# EAGLE board PCB_v106 (EAGLE 9.7.0)
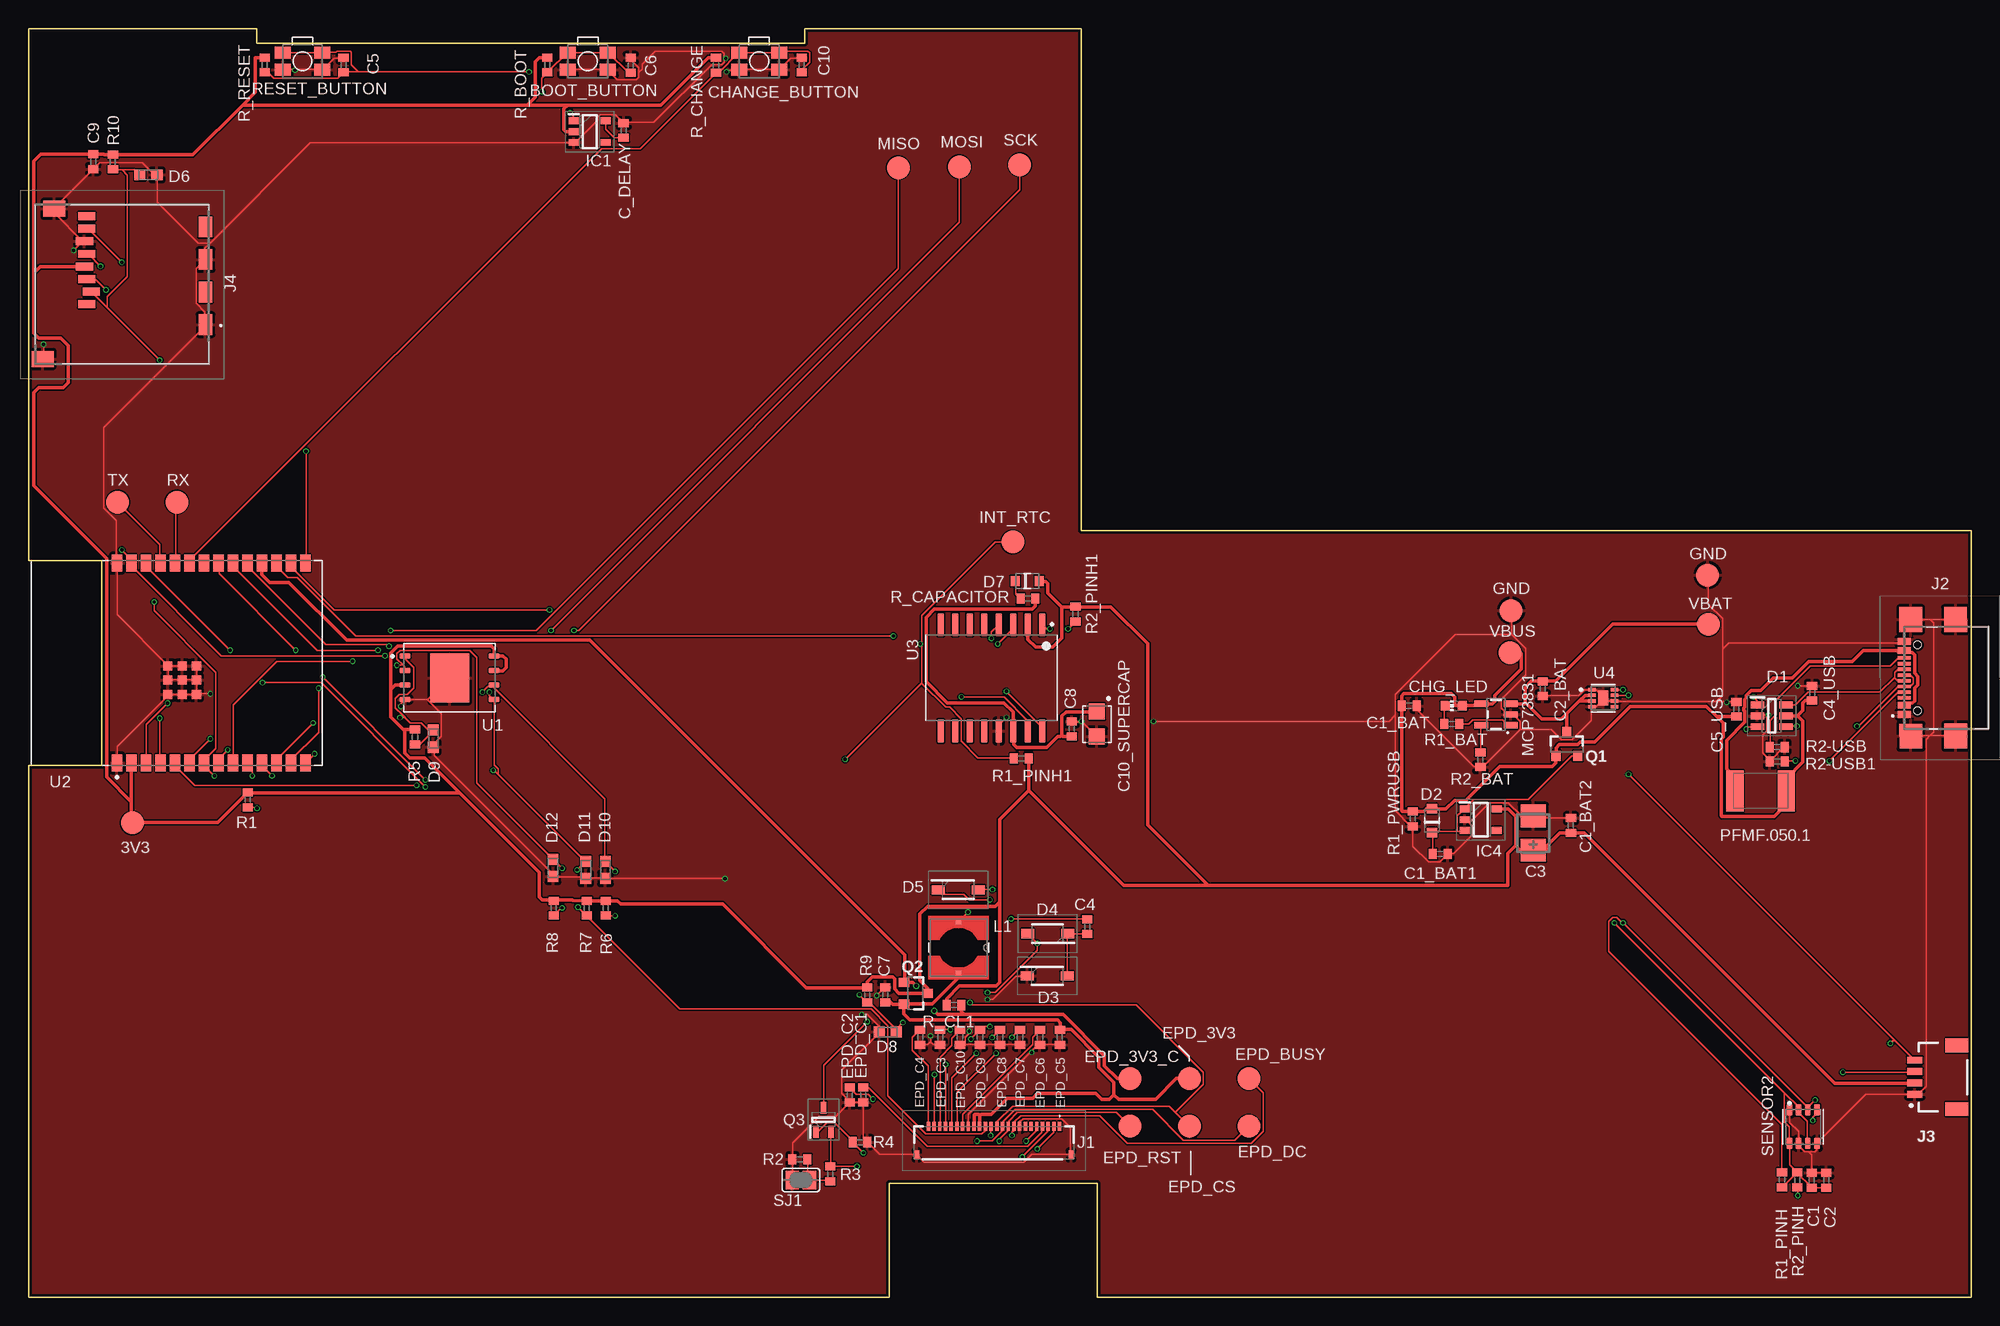
[diagram p0: board, top side]
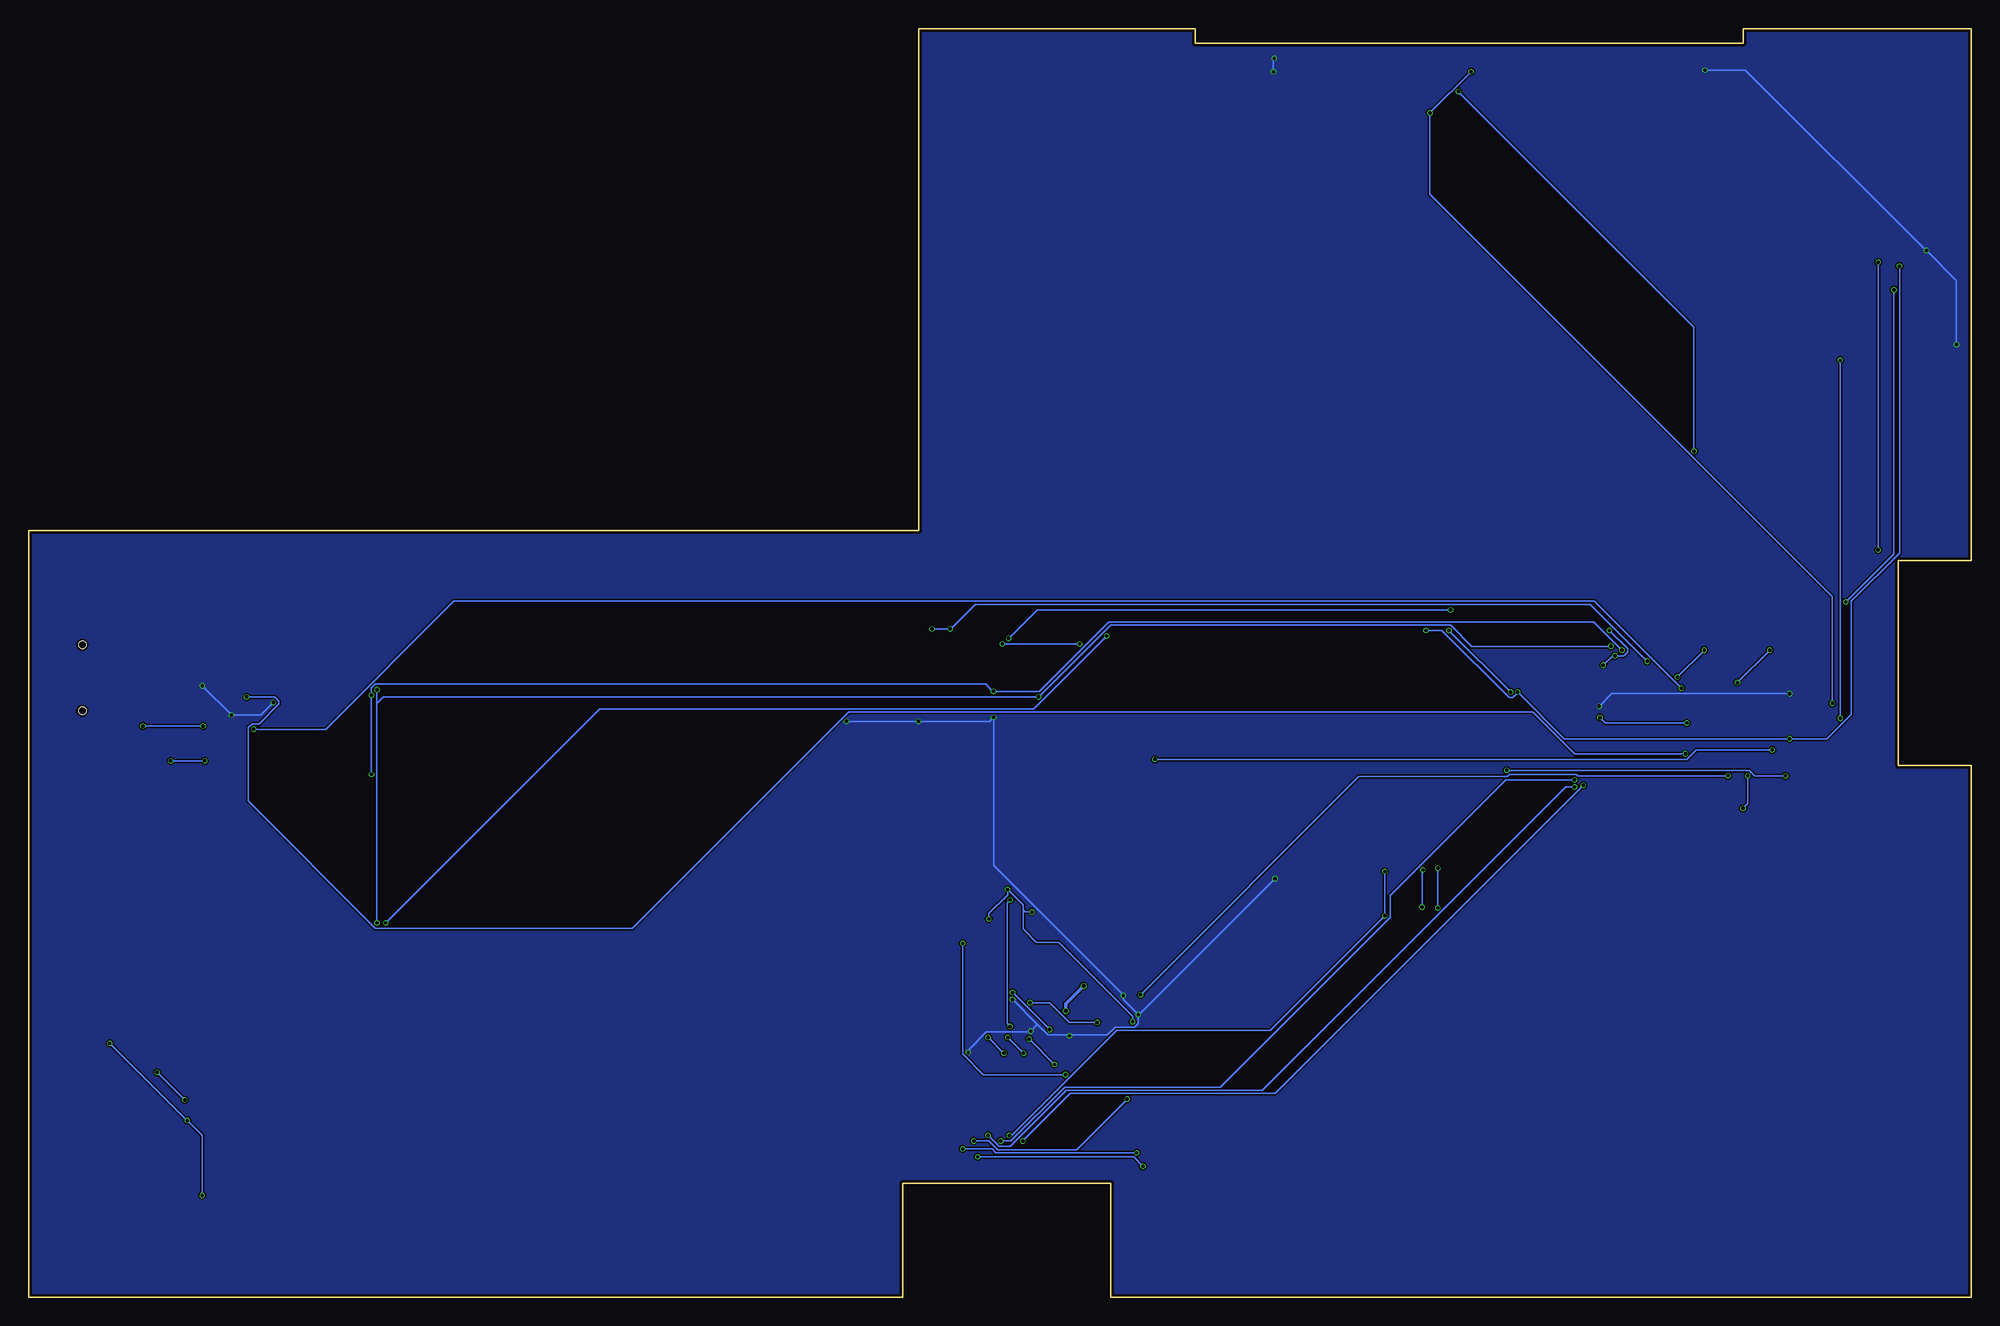
[diagram p1: board, bottom side, seen from below]

Size 170.2 x 111.2 mm. Coordinates in mm from the lower left corner, seen from the top.
Outline: 0,0 75.4,0 75.4,10 93.6,10 93.6,0 170.2,0 170.2,67.2 92.2,67.2 92.2,111.2 68,111.2 68,109.9 20,109.9 20,111.2 0,111.2 0,64.6 6.4,64.6 6.4,46.6 0,46.6 0,0
Copper layers (1*16): Top 0.035mm / dielectric 1.6mm / Bottom 0.035mm
Design rules "jlcpcb-2layers.dru *": minimum track width 5mil, minimum drill 0.3mm, track to track 5mil, track to pad 5mil, pad to pad 5mil, via to via 5mil, smd to smd 5mil, copper to edge 0.2mm, drill to drill 6mil, minimum pad ring 10mil, minimum via ring 3mil, stop-mask expansion 4mil, vias tented up to drill 0mil, thermal gap 10mil
Net classes: 0 default: width 0.15 mm; 1 SupplyLines: width 0.3 mm

## Footprints (pad centres in the part's own frame; a part is rotated, then mirrored left to right if it is on the bottom)
MYBUTTON = smd 1.4 x 1.05: 1 1.75,0.75; 2 -1.75,0.75; 3 -1.75,-0.75; 4 1.75,-0.75
EAGLE-LTSPICE_C0402 = smd 0.7 x 0.9: 1 -0.65,0; 2 0.65,0
RCL_CT3528 = smd 2 x 2.2: + -1.5,0; - 1.5,0
CAPCP3225X100N = smd 1.4 x 1.4: 1 -1.1,0; 2 1.1,0
ADAFRUIT_CHIP-LED0603 = smd 0.8 x 0.8: A 0,-0.75; C 0,0.75
SOT95P280X145-6N = smd 1.2 x 0.6: 1 -1.25,0.95; 2 -1.25,0; 3 -1.25,-0.95; 4 1.25,-0.95; 5 1.25,0; 6 1.25,0.95
ESP32_WROVER_AVX---SD0805S020S1R0_AVX_SD0805S020S1R0_0 = smd 0.8 x 0.9: 1 -1.05,0; 2 1.05,0
SOD3716X135N = smd 1.15 x 0.8: 1 -1.75,0; 2 1.75,0
DIOC1608X36N = smd 0.97 x 0.94: 1 -0.75,0; 2 0.75,0
SOT95P280X125-5N = smd 0.9 x 0.6: 1 -1.4,0.95; 2 -1.4,0; 3 -1.4,-0.95; 4 1.4,-0.95; 5 1.4,0.95
SOT95P280X120-5N = smd 0.9 x 0.6: 1 -1.4,0.95; 2 -1.4,0; 3 -1.4,-0.95; 4 1.4,-0.95; 5 1.4,0.95
FH34SRJ24S05SH99 = smd 0.3 x 0.8: 1 5.75,1.45; 2 5.25,1.45; 3 4.75,1.45; 4 4.25,1.45; 5 3.75,1.45; 6 3.25,1.45; 7 2.75,1.45; 8 2.25,1.45; 9 1.75,1.45; 10 1.25,1.45; 11 0.75,1.45; 12 0.25,1.45; 13 -0.25,1.45; 14 -0.75,1.45; 15 -1.25,1.45; 16 -1.75,1.45; 17 -2.25,1.45; 18 -2.75,1.45; 19 -3.25,1.45; 20 -3.75,1.45; 21 -4.25,1.45; 22 -4.75,1.45; 23 -5.25,1.45; 24 -5.75,1.45 | smd 0.4 x 0.8: MP1 6.75,-1.05; MP2 -6.75,-1.05
SAMACSYS_PARTS_USB4110GFA = smd 0.3 x 1.15: A1 -3.35,3.678; A4 -2.55,3.678; A5 -1.25,3.678; A6 -0.25,3.678; A7 0.25,3.678; A8 1.25,3.678; A9 2.55,3.678; A12 3.35,3.678; B1 3.05,3.678; B4 2.25,3.678; B5 1.75,3.678; B6 0.75,3.678; B7 -0.75,3.678; B8 -1.75,3.678; B9 -2.25,3.678; B12 -3.05,3.678 | smd 2.18 x 2: MP1 -5.11,-0.827; MP2 5.11,-0.827; MP3 -5.11,3.103; MP4 5.11,3.103 | hole 0.65: -2.89,2.503; 2.89,2.503
JST04_1MM_RA = smd 0.6 x 1.35: 1 -1.5,0; 2 -0.5,0; 3 0.5,0; 4 1.5,0 | smd 1.2 x 2: NC1 2.8,-3.675; NC2 -2.8,-3.675
112ATAARR03ATTEND = smd 1.8 x 1.2: G1 10.6,10.4; G2 4.9,10.4; S1 7.75,10.4; S2 2.05,10.4 | smd 1.4 x 1.9: G3 13.6,-3.85; G4 0.45,-2.85 | smd 0.7 x 1.5: P1 8.8,0; P2 7.7,0.4; P3 6.6,0; P4 5.5,-0.2; P5 4.4,0; P6 3.3,-0.2; P7 2.2,0; P8 1.1,0
IND_4828-WE-TPC_WRE = smd 0.5 x 0.5: 1 -2.286,0; 2 2.286,0
ESP32_WROVER_SPARKFUN-IC-POWER_SOT23-5 = smd 0.55 x 1.2: 1 -0.95,-1.3; 2 0,-1.3; 3 0.95,-1.3; 4 0.95,1.3; 5 -0.95,1.3
ESP32C6_VARISTOR_CT/CN1812 = smd 1.5 x 3.6: 1 -2.25,0; 2 2.25,0
ESP32_WROVER_SPARKFUN-DISCRETESEMI_SOT23-3 = smd 0.8 x 0.9: 1 -0.95,-1; 2 0.95,-1; 3 0,1.1
SOT65P210X110-3N = smd 1.05 x 0.5: 1 -1.05,0.65; 2 -1.05,-0.65; 3 1.05,0
ESP32_WROVER_EAGLE-LTSPICE_R0402 = smd 0.7 x 0.9: 1 -0.65,0; 2 0.65,0
ESP32_WROVER_BME680_PSON80P300X300X100-8N = smd 1.016 x 0.5: 1 1.458,1.2; 2 1.458,0.4; 3 1.458,-0.4; 4 1.458,-1.2; 5 -1.458,-1.22; 6 -1.458,-0.4; 7 -1.458,0.4; 8 -1.458,1.2
SJ = smd 1.168 x 1.6: 1 -0.762,0; 2 0.762,0
TP20R = smd 2 x 2: TP 0,0
SON127P600X800X80-9N = smd 0.94 x 0.44: 1 -3.895,1.905; 2 -3.895,0.635; 3 -3.895,-0.635; 4 -3.895,-1.905; 5 3.895,-1.905; 6 3.895,-0.635; 7 3.895,0.635; 8 3.895,1.905 | smd 3.4 x 4.3: 9 0,0
XCVR_ESP32-C6-WROOM-1-N8 = smd 1.5 x 0.9: 1 -8.75,5.26; 2 -8.75,3.99; 3 -8.75,2.72; 4 -8.75,1.45; 5 -8.75,0.18; 6 -8.75,-1.09; 7 -8.75,-2.36; 8 -8.75,-3.63; 9 -8.75,-4.9; 10 -8.75,-6.17; 11 -8.75,-7.44; 12 -8.75,-8.71; 13 -8.75,-9.98; 14 -8.75,-11.25; 15 8.75,-11.25; 16 8.75,-9.98; 17 8.75,-8.71; 18 8.75,-7.44; 19 8.75,-6.17; 20 8.75,-4.9; 21 8.75,-3.63; 22 8.75,-2.36; 23 8.75,-1.09; 24 8.75,0.18; 25 8.75,1.45; 26 8.75,2.72; 27 8.75,3.99; 28 8.75,5.26 | smd 0.8 x 0.8: 29_1 -2.755,0.79; 29_2 -1.505,0.79; 29_3 -0.255,0.79; 29_4 -2.755,-0.46; 29_5 -1.505,-0.46; 29_6 -0.255,-0.46; 29_7 -2.755,-1.71; 29_8 -1.505,-1.71; 29_9 -0.255,-1.71
SOIC127P1032X265-16N = smd 2.05 x 0.59: 1 -4.655,4.445; 2 -4.655,3.175; 3 -4.655,1.905; 4 -4.655,0.635; 5 -4.655,-0.635; 6 -4.655,-1.905; 7 -4.655,-3.175; 8 -4.655,-4.445; 9 4.655,-4.445; 10 4.655,-3.175; 11 4.655,-1.905; 12 4.655,-0.635; 13 4.655,0.635; 14 4.655,1.905; 15 4.655,3.175; 16 4.655,4.445
SON50P200X200X80-9N = smd 0.76 x 0.3: 1 -0.985,0.75; 2 -0.985,0.25; 3 -0.985,-0.25; 4 -0.985,-0.75; 5 0.985,-0.75; 6 0.985,-0.25; 7 0.985,0.25; 8 0.985,0.75 | smd 0.9 x 1.3: 9 0,0

## Placement (x,y rotation side)
BOOT_BUTTON  BUTTON_CUSYOMV1.  [MYBUTTON]  49,108.34 180 top
C1  100nF  [EAGLE-LTSPICE_C0402]  156.2,10.28 90 top
C1_BAT  4.7uF  [EAGLE-LTSPICE_C0402]  120.94,51.85 0 top
C1_BAT1  4.7uF  [EAGLE-LTSPICE_C0402]  123.67,38.87 0 top
C1_BAT2  4.7uF  [EAGLE-LTSPICE_C0402]  135.11,41.37 90 top
C2  100nF  [EAGLE-LTSPICE_C0402]  157.48,10.28 90 top
C2_BAT  4.7uF  [EAGLE-LTSPICE_C0402]  132.65,53.35 270 top
C3  100uF TANT  [RCL_CT3528]  131.81,40.7 90 top
C4  4.7uF/25V  [EAGLE-LTSPICE_C0402]  92.75,32.49 90 top
C4_USB  100nF  [EAGLE-LTSPICE_C0402]  156.24,52.95 90 top
C5  1uF  [EAGLE-LTSPICE_C0402]  27.6,108 90 top
C5_USB  4.7uF  [EAGLE-LTSPICE_C0402]  149.61,51.55 90 top
C6  100nF  [EAGLE-LTSPICE_C0402]  52.75,107.97 90 top
C7  10uF  [EAGLE-LTSPICE_C0402]  75.04,26.53 90 top
C8  100nF  [EAGLE-LTSPICE_C0402]  91.39,49.83 90 top
C9  100nF  [EAGLE-LTSPICE_C0402]  5.67,99.53 270 top
C10  100nF  [EAGLE-LTSPICE_C0402]  67.73,108 90 top
C10_SUPERCAP  CPH3225A  [CAPCP3225X100N]  93.59,50.24 270 top
C_DELAY  100nF  [EAGLE-LTSPICE_C0402]  52.13,102.27 90 top
CHANGE_BUTTON  BUTTON_CUSYOMV1.  [MYBUTTON]  64,108.34 180 top
CHG_LED  [ADAFRUIT_CHIP-LED0603]  124.84,51.85 90 top
D1  USBLC6-2SC6Y  [SOT95P280X145-6N]  152.7,50.97 0 top
D2  ESP32_WROVER_AVX---SD0805S020S1R0_AVX_SD0805S020S1R0_0_0  [ESP32_WROVER_AVX---SD0805S020S1R0_AVX_SD0805S020S1R0_0]  122.94,41.78 90 top
D3  MBR0530.  [SOD3716X135N]  89.23,28.18 0 top
D4  MBR0530.  [SOD3716X135N]  89.27,31.88 180 top
D5  MBR0530.  [SOD3716X135N]  81.44,35.73 0 top
D6  PGB1010603MR.  [DIOC1608X36N]  10.5,98.37 180 top
D7  SD0805S020S1R0  [ESP32_WROVER_AVX---SD0805S020S1R0_AVX_SD0805S020S1R0_0]  87.49,62.78 0 top
D8  PGB1010603MR.  [DIOC1608X36N]  75.28,23.27 0 top
D9  PGB1010603MR.  [DIOC1608X36N]  35.46,48.97 90 top
D10  PGB1010603MR.  [DIOC1608X36N]  50.54,37.47 90 top
D11  PGB1010603MR.  [DIOC1608X36N]  48.82,37.47 90 top
D12  PGB1010603MR.  [DIOC1608X36N]  45.95,37.63 90 top
EPD_C1  1uF/50V  [EAGLE-LTSPICE_C0402]  73.12,17.75 90 top
EPD_C2  1uF/50V  [EAGLE-LTSPICE_C0402]  71.93,17.75 90 top
EPD_C3  1uF/50V  [EAGLE-LTSPICE_C0402]  79.85,22.8 90 top
EPD_C4  1uF/50V  [EAGLE-LTSPICE_C0402]  78.1,22.8 90 top
EPD_C5  0.1uF/50V  [EAGLE-LTSPICE_C0402]  90.35,22.8 90 top
EPD_C6  1uF/50V  [EAGLE-LTSPICE_C0402]  88.6,22.8 90 top
EPD_C7  1uF/50V  [EAGLE-LTSPICE_C0402]  86.85,22.8 90 top
EPD_C8  1uF/50V  [EAGLE-LTSPICE_C0402]  85.1,22.8 90 top
EPD_C9  1uF/50V  [EAGLE-LTSPICE_C0402]  83.35,22.8 90 top
EPD_C10  1uF/50V  [EAGLE-LTSPICE_C0402]  81.6,22.8 90 top
IC1  BD5229G-TR  [SOT95P280X125-5N]  49.17,102.17 0 top
IC4  XC6220A331MR-G  [SOT95P280X120-5N]  127.21,41.87 0 top
J1  FH34SRJ-24S-0.5SH_99_  [FH34SRJ24S05SH99]  84.57,13.54 0 top
J2  SAMACSYS_PARTS_USB4110-GF-A  [SAMACSYS_PARTS_USB4110GFA]  167.99,54.3 90.1 top
J3  QWIIC_RIGHT_ANGLE  [JST04_1MM_RA]  165.23,19.3 90 top
J4  112A-TAAR-R03_ATTEND  [112ATAARR03ATTEND]  5.1,95.85 270 top
L1  68uH  [IND_4828-WE-TPC_WRE]  81.47,30.65 270 top
MCP73831  ESP32_WROVER_SPARKFUN-IC-POWER_MCP73831  [ESP32_WROVER_SPARKFUN-IC-POWER_SOT23-5]  128.55,51.09 90 top
PFMF.050.1  ESP32C6_VARISTORCN1812  [ESP32C6_VARISTOR_CT/CN1812]  151.74,44.4 0 top
Q1  20V/4.2A/52mΩ/1.4W  [ESP32_WROVER_SPARKFUN-DISCRETESEMI_SOT23-3]  134.76,48.46 0 top
Q2  20V/4.2A/52mΩ/1.4W  [ESP32_WROVER_SPARKFUN-DISCRETESEMI_SOT23-3]  77.68,26.66 270 top
Q3  SI1308EDL-T1-GE3  [SOT65P210X110-3N]  69.64,15.58 90 top
R1  10K  [ESP32_WROVER_EAGLE-LTSPICE_R0402]  19.21,43.61 90 top
R1_BAT  200  [ESP32_WROVER_EAGLE-LTSPICE_R0402]  124.66,50.25 0 top
R1_PINH  10K  [ESP32_WROVER_EAGLE-LTSPICE_R0402]  153.6,10.32 270 top
R1_PINH1  10K  [ESP32_WROVER_EAGLE-LTSPICE_R0402]  86.96,47.24 0 top
R1_PWRUSB  100K  [ESP32_WROVER_EAGLE-LTSPICE_R0402]  121.25,41.94 90 top
R2  2.2  [ESP32_WROVER_EAGLE-LTSPICE_R0402]  67.57,12.11 0 top
R2-USB  5k1  [ESP32_WROVER_EAGLE-LTSPICE_R0402]  153.19,48.23 0 top
R2-USB1  5k1  [ESP32_WROVER_EAGLE-LTSPICE_R0402]  153.19,46.97 0 top
R2_BAT  2K  [ESP32_WROVER_EAGLE-LTSPICE_R0402]  127.18,47.13 90 top
R2_PINH  10K  [ESP32_WROVER_EAGLE-LTSPICE_R0402]  154.93,10.3 90 top
R2_PINH1  10K  [ESP32_WROVER_EAGLE-LTSPICE_R0402]  91.71,59.89 90 top
R3  0.47  [ESP32_WROVER_EAGLE-LTSPICE_R0402]  70.22,10.83 90 top
R4  10K  [ESP32_WROVER_EAGLE-LTSPICE_R0402]  72.83,13.61 180 top
R5  10K  [ESP32_WROVER_EAGLE-LTSPICE_R0402]  33.85,49.11 90 top
R6  10K  [ESP32_WROVER_EAGLE-LTSPICE_R0402]  50.57,34.11 90 top
R7  10K  [ESP32_WROVER_EAGLE-LTSPICE_R0402]  48.89,34.11 90 top
R8  10K  [ESP32_WROVER_EAGLE-LTSPICE_R0402]  46.01,34.11 90 top
R9  10K  [ESP32_WROVER_EAGLE-LTSPICE_R0402]  73.47,26.51 90 top
R10  10K  [ESP32_WROVER_EAGLE-LTSPICE_R0402]  7.39,99.51 90 top
R_BOOT  10K  [ESP32_WROVER_EAGLE-LTSPICE_R0402]  45.44,108 90 top
R_CAPACITOR  15  [ESP32_WROVER_EAGLE-LTSPICE_R0402]  87.55,61.24 0 top
R_CHANGE  10K  [ESP32_WROVER_EAGLE-LTSPICE_R0402]  60.22,107.97 90 top
R_CL1  10K  [ESP32_WROVER_EAGLE-LTSPICE_R0402]  81.07,25.63 180 top
R_RESET  10K  [ESP32_WROVER_EAGLE-LTSPICE_R0402]  20.7,108 90 top
RESET_BUTTON  BUTTON_CUSYOMV1.  [MYBUTTON]  24,108.34 180 top
SENSOR2  BME680  [ESP32_WROVER_BME680_PSON80P300X300X100-8N]  155.46,14.97 90 top
SJ1  [SJ]  67.66,10.29 0 top
TP1  TX  [TP20R]  7.8,69.7 0 top
TP2  RX  [TP20R]  13,69.7 0 top
TP3  VBAT  [TP20R]  147.15,58.99 0 top
TP4  GND  [TP20R]  129.87,60.19 0 top
TP5  GND  [TP20R]  147.09,63.29 0 top
TP6  MISO  [TP20R]  76.2,99 0 top
TP7  MOSI  [TP20R]  81.54,99.08 0 top
TP8  SCK  [TP20R]  86.82,99.25 0 top
TP9  EPD_BUSY  [TP20R]  106.9,19.2 0 top
TP10  EPD_CS  [TP20R]  101.7,15 0 top
TP11  EPD_DC  [TP20R]  106.9,15 0 top
TP12  EPD_RST  [TP20R]  96.5,15 0 top
TP13  EPD_3V3_C  [TP20R]  96.5,19.2 0 top
TP14  VBUS  [TP20R]  129.77,56.51 0 top
TP15  INT_RTC  [TP20R]  86.22,66.21 0 top
TP16  3V3  [TP20R]  9.09,41.59 0 top
TP17  EPD_3V3  [TP20R]  101.7,19.2 0 top
U1  W25Q512JVEIQ  [SON127P600X800X80-9N]  36.89,54.3 0 top
U2  ESP32-C6-WROOM-1-N8  [XCVR_ESP32-C6-WROOM-1-N8]  13,55.6 90 top
U3  DS3231SN#  [SOIC127P1032X265-16N]  84.35,54.3 270 top
U4  MAX17048G+T10  [SON50P200X200X80-9N]  137.94,52.52 0 top

## Library data of the parts
BOOT_BUTTON C1 C1_BAT C1_BAT1 C1_BAT2 C2 C2_BAT C4 C4_USB C5 C5_USB C6-C10 C_DELAY CHANGE_BUTTON CHG_LED D2-D12 EPD_C1-EPD_C10 PFMF.050.1 Q1 Q2 R1 R1_BAT R1_PINH R1_PINH1 R1_PWRUSB R2 R2-USB R2-USB1 R2_BAT R2_PINH R2_PINH1 R3-R10 R_BOOT R_CAPACITOR R_CHANGE R_CL1 R_RESET RESET_BUTTON SJ1 TP1-TP17 = DeskAssistant v19 v1
C3 = DeskAssistant v19 v1; SPICEPREFIX: C
C10_SUPERCAP = DeskAssistant v19 v1; AVAILABILITY: Not in stock; CHECK_PRICES: https://www.snapeda.com/parts/CPH3225A/Seiko+Instruments/view-part/?ref=eda; DESCRIPTION: 11 mF (EDLC) Supercapacitor 3.3 V 1210 (3225 Metric) - -; MF: Seiko Instruments; MP: CPH3225A; PACKAGE: 1210 Seiko; PRICE: None; PURCHASE-URL: https://www.snapeda.com/api/url_track_click_mouser/?unipart_id=562593&manufacturer=Seiko Instruments&part_name=CPH3225A&search_term=None; SNAPEDA_LINK: https://www.snapeda.com/parts/CPH3225A/Seiko+Instruments/view-part/?ref=snap
D1 = DeskAssistant v19 v1; AVAILABILITY: In Stock; CHECK_PRICES: https://www.snapeda.com/parts/USBLC6-2SC6Y/STMicroelectronics/view-part/?ref=eda; DESCRIPTION: 17V Clamp 5A (8/20µs) Ipp Tvs Diode Surface Mount SOT-23-6; MF: STMicroelectronics; MP: USBLC6-2SC6Y; PACKAGE: SOT-23-6 STMicroelectronics; PRICE: None; SNAPEDA_LINK: https://www.snapeda.com/parts/USBLC6-2SC6Y/STMicroelectronics/view-part/?ref=snap
IC1 = DeskAssistant v19 v1; DESCRIPTION: Voltage Detector with Adjustable Delay Time: CMOS processes are utilized to develop high precision, low current consumption CMOS reset ICs that allow arbitrary setting of the delay time. The extensive lineup includes both Nch Open Drain and CMOS output types in a wide range of detection voltages (from 2.3V to 6.0V, in 0.1V steps), enabling selection of the ideal solution based on customer requirements. In addition, the entire series is of course both lead-free and RoHS-compliant.; HEIGHT: 1.25mm; MANUFACTURER_NAME: ROHM Semiconductor; MANUFACTURER_PART_NUMBER: BD5229G-TR; MOUSER_PART_NUMBER: 755-BD5229G-TR; MOUSER_PRICE-STOCK: https://www.mouser.co.uk/ProductDetail/ROHM-Semiconductor/BD5229G-TR?qs=4kLU8WoGk0vvnhrrYwdszw%3D%3D
IC4 = DeskAssistant v19 v1; DESCRIPTION: LDO Voltage Regulators; HEIGHT: 1.2mm; MANUFACTURER_NAME: Torex; MANUFACTURER_PART_NUMBER: XC6220A331MR-G; MOUSER_PART_NUMBER: 865-XC6220A331MR-G; MOUSER_PRICE-STOCK: https://www.mouser.co.uk/ProductDetail/Torex-Semiconductor/XC6220A331MR-G?qs=AsjdqWjXhJ8ZSWznL1J0gg%3D%3D
J1 = DeskAssistant v19 v1; DESCRIPTION: 24 Position FFC, FPC Connector Contacts, Top and Bottom 0.020" (0.50mm) Surface Mount, Right Angle; HEIGHT: 1.1mm; MANUFACTURER_NAME: Hirose; MANUFACTURER_PART_NUMBER: FH34SRJ-24S-0.5SH(99); MOUSER_PART_NUMBER: 798-FH34SRJ24S05SH99; MOUSER_PRICE-STOCK: https://www.mouser.co.uk/ProductDetail/Hirose-Connector/FH34SRJ-24S-0.5SH99?qs=vcbW%252B4%252BSTIpKBl5ap9J8Fw%3D%3D
J2 = DeskAssistant v19 v1; DESCRIPTION: CONN USB 2.0 TYPE-C R/A SMT; HEIGHT: 3.26mm; MANUFACTURER_NAME: GCT (GLOBAL CONNECTOR TECHNOLOGY); MANUFACTURER_PART_NUMBER: USB4110-GF-A; MOUSER_PART_NUMBER: 640-USB4110-GF-A; MOUSER_PRICE-STOCK: https://www.mouser.co.uk/ProductDetail/GCT/USB4110-GF-A?qs=KUoIvG%2F9IlYiZvIXQjyJeA%3D%3D
J3 = DeskAssistant v19 v1; PROD_ID: CONN-13694
J4 = DeskAssistant v19 v1; DESCRIPTION: Micro SD Card Socket, Push-Push Type, Top Mount, SMT, H=1.83mm, 10u; HEIGHT: 1.9mm; MANUFACTURER_NAME: ATTEND; MANUFACTURER_PART_NUMBER: 112A-TAAR-R03 ATTEND
L1 = DeskAssistant v19 v1; COPYRIGHT: Copyright (C) 2024 Ultra Librarian. All rights reserved.; MANUFACTURER_PART_NUMBER: 744043680; MFR_NAME: Wurth Electronics
MCP73831 = DeskAssistant v19 v1; PROD_ID: IC-09995
Q3 = DeskAssistant v19 v1; AVAILABILITY: In Stock; CHECK_PRICES: https://www.snapeda.com/parts/SI1308EDL-T1-GE3/Vishay+Siliconix/view-part/?ref=eda; DESCRIPTION: Si1308EDL-T1-GE3 N-channel MOSFET Transistor, 1.5 A, 30 V, 3-Pin SC-70 | Siliconix / Vishay SI1308EDL-T1-GE3; MF: Vishay Siliconix; MP: SI1308EDL-T1-GE3; PACKAGE: SOT-323 Vishay Semiconductor; PRICE: None; PURCHASE-URL: https://www.snapeda.com/api/url_track_click_mouser/?unipart_id=274603&manufacturer=Vishay Siliconix&part_name=SI1308EDL-T1-GE3&search_term=None; SNAPEDA_LINK: https://www.snapeda.com/parts/SI1308EDL-T1-GE3/Vishay+Siliconix/view-part/?ref=snap
SENSOR2 = DeskAssistant v19 v1; AVAILABILITY: Unavailable; DESCRIPTION: Integrated Environmental Unit; MF: Bosch Sensortec; MP: BME680; PACKAGE: LGA-8 Bosch Tools; PRICE: None
U1 = DeskAssistant v19 v1; AVAILABILITY: In Stock; CHECK_PRICES: https://www.snapeda.com/parts/W25Q512JVEIQ/Winbond+Electronics/view-part/?ref=eda; DESCRIPTION: FLASH - NOR Memory IC 512Mb (64M x 8) SPI - Quad I/O 133 MHz 8-WSON (8x6); MF: Winbond Electronics; MP: W25Q512JVEIQ; PACKAGE: Package; PRICE: None; SNAPEDA_LINK: https://www.snapeda.com/parts/W25Q512JVEIQ/Winbond+Electronics/view-part/?ref=snap
U2 = DeskAssistant v19 v1; AVAILABILITY: In Stock; CHECK_PRICES: https://www.snapeda.com/parts/ESP32-C6-WROOM-1-N8/Espressif+Systems/view-part/?ref=eda; DESCRIPTION: Multiprotocol Modules ESP32-C6 module, Wi-Fi 6 in 2.4 GHz band, Bluetooth 5, Zigbee 3.0 and Thread. ESP34-WROOM Compatible - ENGINEERING SAMPLE; MF: Espressif Systems; MP: ESP32-C6-WROOM-1-N8; PACKAGE: None; PRICE: None; SNAPEDA_LINK: https://www.snapeda.com/parts/ESP32-C6-WROOM-1-N8/Espressif+Systems/view-part/?ref=snap
U3 = DeskAssistant v19 v1; AVAILABILITY: In Stock; CHECK_PRICES: https://www.snapeda.com/parts/DS3231SN%23/Analog+Devices/view-part/?ref=eda; DESCRIPTION: Extremely Accurate I²C-Integrated RTC/TCXO/Crystal; MF: Analog Devices; MP: DS3231SN#; PACKAGE: SOIC-16 Maxim; PRICE: None; PURCHASE-URL: https://www.snapeda.com/api/url_track_click_mouser/?unipart_id=99048&manufacturer=Analog Devices&part_name=DS3231SN#&search_term=None; SNAPEDA_LINK: https://www.snapeda.com/parts/DS3231SN%23/Analog+Devices/view-part/?ref=snap
U4 = DeskAssistant v19 v1; AVAILABILITY: In Stock; CHECK_PRICES: https://www.snapeda.com/parts/MAX17048G+T10/Analog+Devices/view-part/?ref=eda; DESCRIPTION: 3µA 1-Cell/2-Cell Fuel Gauge with ModelGauge; MF: Analog Devices; MP: MAX17048G+T10; PACKAGE: TDFN-8 Maxim; PRICE: None; PURCHASE-URL: https://www.snapeda.com/api/url_track_click_mouser/?unipart_id=329239&manufacturer=Analog Devices&part_name=MAX17048G+T10&search_term=None; SNAPEDA_LINK: https://www.snapeda.com/parts/MAX17048G+T10/Analog+Devices/view-part/?ref=snap

## Nets
3V3 [SupplyLines]: C1_BAT2.1 C3.+ C9.1 D7.2 IC1.2 IC4.5 J3.2 J4.P4 Q2.3 R1.2 R1_PINH1.2 R2_PINH1.2 R5.2 R6.2 R7.2 R8.2 R9.2 R10.2 R_BOOT.2 R_CHANGE.2 R_CL1.2 R_RESET.2 TP16.TP U1.3 U1.7 U1.8 U2.2 U3.2
32KHZ: R2_PINH1.1 U2.9 U3.1
DN: D1.4 J2.A7 J2.B7
DP: D1.6 J2.A6 J2.B6
EPD_3V3 [SupplyLines]: C7.1 EPD_C5.2 J1.15 J1.16 L1.2 Q2.2 TP17.TP
EPD_3V3_C [SupplyLines]: Q2.1 R_CL1.1 TP13.TP U2.18
EPD_BUSY: J1.9 TP9.TP U2.26
EPD_CS: D8.2 J1.12 R9.1 TP10.TP U2.11
EPD_DC: J1.11 TP11.TP U2.5
EPD_RST: J1.10 TP12.TP U2.21
FLASH_CS: D9.2 R5.1 U1.1 U2.12
GDR: J1.2 Q3.1 R4.2
GND: BOOT_BUTTON.1 BOOT_BUTTON.2 C1.2 C1_BAT1.2 C1_BAT2.2 C1_BAT.2 C2.2 C2_BAT.2 C3.- C4_USB.2 C5.2 C5_USB.2 C6.2 C7.2 C8.2 C9.2 C10.2 C10_SUPERCAP.2 C_DELAY.2 CHANGE_BUTTON.1 CHANGE_BUTTON.2 D1.2 D3.1 D6.1 D8.1 D9.1 D10.1 D11.1 D12.1 EPD_C1.1 EPD_C2.1 EPD_C3.1 EPD_C4.1 EPD_C5.1 EPD_C6.1 EPD_C7.1 EPD_C8.1 EPD_C9.1 EPD_C10.1 IC1.3 IC4.2 J1.8 J1.17 J1.MP1 J1.MP2 J2.A1 J2.A12 J2.B1 J2.B12 J2.MP1 J2.MP2 J2.MP3 J2.MP4 J3.1 J4.G1 J4.G2 J4.G3 J4.G4 J4.P6 MCP73831.2 R1_PWRUSB.1 R2-USB1.1 R2-USB.2 R2.1 R2_BAT.1 R4.1 RESET_BUTTON.1 RESET_BUTTON.2 SENSOR2.1 SENSOR2.5 SENSOR2.7 SJ1.1 TP4.TP TP5.TP U1.4 U1.9 U2.1 U2.28 U2.29_1 U2.29_2 U2.29_3 U2.29_4 U2.29_5 U2.29_6 U2.29_7 U2.29_8 U2.29_9 U3.13 U4.1 U4.4 U4.6 U4.9
GPIO8: R1.1 U2.10
I2C_PW: C1.1 C2.1 R1_PINH.2 R2_PINH.2 SENSOR2.2 SENSOR2.6 SENSOR2.8 U2.17
INT_RTC: R1_PINH1.1 TP15.TP U2.8 U3.3
IO/BOOT: BOOT_BUTTON.3 BOOT_BUTTON.4 C6.1 R_BOOT.1 U2.15
IO/CHANGE: C10.1 CHANGE_BUTTON.3 CHANGE_BUTTON.4 R_CHANGE.1 U2.23
MISO: D12.2 J4.P7 R8.1 TP6.TP U1.2 U2.27
MOSI: D11.2 J1.14 J4.P3 R7.1 TP7.TP U1.5 U2.7
N$1: J2.B5 R2-USB.1
N$2: J2.A5 R2-USB1.2
N$3: C1_BAT1.1 D2.1 IC4.1 IC4.3 Q1.2
N$4: C4.1 D3.2 D4.1
N$5: MCP73831.1 R1_BAT.2
N$6: EPD_C1.2 J1.4
N$7: MCP73831.5 R2_BAT.2
N$8: CHG_LED.C R1_BAT.1
N$10: EPD_C2.2 J1.5
N$11: EPD_C8.2 J1.20
N$13: EPD_C10.2 J1.22
N$14: C_DELAY.1 IC1.5
N$15: EPD_C4.2 J1.24
N$16: D7.1 R_CAPACITOR.1
N$17: EPD_C6.2 J1.18
N$18: EPD_C7.2 J1.19
PREVGH: D5.1 EPD_C9.2 J1.21
PREVGL: D4.2 EPD_C3.2 J1.23
RESE: J1.3 Q3.2 R3.2
RESE': R2.2 R3.1 SJ1.2
RESET: C5.1 IC1.1 R_RESET.1 RESET_BUTTON.3 RESET_BUTTON.4 U2.3
RTC_RST: U2.16 U3.4
RX: TP2.TP U2.24
SCK: D10.2 J1.13 J4.P5 R6.1 TP8.TP U1.6 U2.6
SCL: J3.4 R2_PINH.1 SENSOR2.4 U2.20 U3.16 U4.7
SDA: J3.3 R1_PINH.1 SENSOR2.3 U2.19 U3.15 U4.8
SRC: C4.2 D5.2 L1.1 Q3.3
SS_SD: D6.2 J4.P2 R10.1 U2.4
TX: TP1.TP U2.25
USB_D+: D1.1 U2.14
USB_D-: D1.3 U2.13
VBAT [SupplyLines]: C2_BAT.1 MCP73831.3 Q1.3 TP3.TP U4.2 U4.3
VBUS [SupplyLines]: C1_BAT.1 C4_USB.1 C5_USB.1 CHG_LED.A D1.5 D2.2 MCP73831.4 PFMF.050.1.2 Q1.1 R1_PWRUSB.2 TP14.TP
VRTC [SupplyLines]: C8.1 C10_SUPERCAP.1 R_CAPACITOR.2 U3.14
VUSB [SupplyLines]: J2.A4 J2.A9 J2.B4 J2.B9 PFMF.050.1.1

## Tracks (layer width: path | path; a pad name or v marks a point on that pad's centre or on a via)
3V3
  Top 0.3: 47.23,104.5 46.88,104.15 46.88,102.34 47.05,102.17 IC1.2 | 47.23,104.5 55.4,104.5 59.52,108.62 60.18,108.62 R_CHANGE.2 | R_RESET.2 20.64,108.65 19.88,108.65 19.87,108.65 19.87,105.6 18.77,104.5 | 18.77,104.5 14.4,100.14 7.48,100.14 R10.2 7.34,100.14 6.65,100.14 6.58,100.2 5.68,100.2 C9.1 1.06,100.18 0.44,99.56 0.44,89.76 | 130.26,39.61 130.26,42.17 129.64,42.8 128.67,42.8 IC4.5 | 130.26,39.61 130.68,39.2 131.78,39.2 C3.+ 131.92,39.2 132.96,39.2 133.03,39.27 133.03,39.61 134.14,40.72 C1_BAT2.1 135.25,40.72 136.28,40.72 158.24,18.77 165.2,18.77 J3.2 | 90.51,60.52 91.69,60.52 | 90.51,60.52 89.3,61.73 89.3,62.57 89.13,62.74 88.57,62.74 D7.2 | 91.69,60.52 R2_PINH1.2 | U3.2 87.53,58.93 87.53,57.68 88.21,57 89.72,57 90.51,57.79 90.51,60.52 | 9,43.44 9,41.69 TP16.TP 9.14,41.62 16.57,41.62 R1.2 19.32,44.25 19.6,44.25 19.6,44.21 37.79,44.21 | 9,43.44 9,46.81 U2.2 | 47.69,34.79 47.64,34.83 46.12,34.83 R8.2 45.75,34.83 45.01,34.83 44.74,35.1 44.74,37.25 37.79,44.21 | 47.69,34.79 | 47.69,34.79 R7.2 50.55,34.76 R6.2 50.69,34.76 51.59,34.76 51.87,34.49 60.8,34.49 68.14,27.15 73.31,27.15 R9.2 73.47,27.66 73.9,28.09 75.7,28.09 75.86,27.93 75.86,27.02 76.22,26.66 78.67,26.66 Q2.3 78.78,27.1 78.09,27.79 78.09,33.62 78.76,34.29 84.67,34.29 85.06,34.68 | U1.7 40.79,54.91 41.55,54.91 41.83,55.19 41.83,55.94 41.54,56.23 40.79,56.23 U1.8 40.78,56.84 40.54,57.08 32.36,57.08 31.74,56.46 31.74,53.28 | 32.96,49.79 32.83,49.79 31.74,50.87 31.74,53.28 | 32.96,49.79 33.79,49.79 R5.2 | 31.74,53.28 32.13,53.67 32.96,53.67 U1.3 | 37.79,44.21 34.69,47.3 33.38,47.3 32.96,47.71 32.96,49.79
  Top 0.3: R_BOOT.2 44.73,108.65 44.38,108.3 44.38,105.2 43.68,104.5 | 47.23,104.5 43.68,104.5 | 43.68,104.5 18.77,104.5 | 0.44,89.76 0.44,84.52 0.88,84.08 2.83,84.08 3.48,83.43 3.48,80.19 3.04,79.75 0.89,79.75 0.45,79.31 0.45,71.16 6.85,64.76 6.85,45.59 9,43.44 | J4.P4 1.03,90.35 0.44,89.76 | 130.26,39.61 129.56,38.91 129.56,36.1 103.34,36.1 | 87.61,44.44 95.95,36.1 103.34,36.1 | 87.61,44.44 R1_PINH1.2 | 103.34,36.1 98.03,41.41 98.03,57.31 94.82,60.52 91.69,60.52 | 87.61,44.44 85.06,41.89 85.06,34.68 | 85.06,34.68 85.06,27.61 84.75,27.3 81.55,27.3 80.42,26.17 R_CL1.2
32KHZ  (via drill 0.3)
  Top 0.15: v91.06,58.59 91.69,59.21 R2_PINH1.1 | v89.47,58.59 89.19,58.59 88.85,58.93 U3.1 | v28.39,55.75 21.74,55.75 17.94,51.94 17.94,46.88 U2.9
  Bottom 0.15: v91.06,58.59 v89.47,58.59 89.4,58.59 87.25,60.73 33.38,60.73 v28.39,55.75
DN  (via drill 0.3)
  Top 0.15: J2.A7 164.33,54.5 164.88,54.5 165.09,54.29 165.09,53.81 164.88,53.6 164.33,53.6 J2.B7 164.26,53.53 163.78,53.53 160.31,50.07 v160.18,50.07 | v154.91,50.07 154.01,50.07 D1.4
  Bottom 0.15: v160.18,50.07 v154.91,50.07
DP
  Top 0.15: 163.5,54.29 163.71,54.08 164.26,54.08 J2.A6 | 163.5,54.29 163.5,54.78 163.71,54.98 164.26,54.98 J2.B6 | D1.6 154.01,51.94 154.77,51.94 155.88,53.05 162.18,53.05 163.43,54.29 163.5,54.29
EPD_3V3
  Top 0.3: 76.66,25.69 75.69,25.69 75.48,25.9 75.05,25.9 C7.1 | 76.66,25.69 Q2.2 79.16,25.72 81.47,28.03 L1.2 | 83.31,16 83.24,16.07 82.89,16.07 82.82,16 82.82,15.03 J1.16 | 83.31,16 83.31,15.03 J1.15 | 95.08,17.77 95.5,17.36 98.73,17.36 100.55,19.18 101.66,19.18 TP17.TP | 95.08,17.77 95.08,17.78 95.08,18.84 93.76,20.15 93.76,21.05 91.34,23.48 90.37,23.48 EPD_C5.2 90.37,23.47 90.37,24.08 90.14,24.31 77.19,24.31 76.66,24.84 76.66,25.69 | 83.31,16 83.45,16.07 84.35,16.07 85.73,17.45 87.95,17.45 88.36,17.87 93.49,17.87 93.99,17.36 94.67,17.36 95.08,17.77
EPD_3V3_C  (via drill 0.35)
  Top 0.3: U2.18 20.43,64.33 20.43,63.36 21.12,62.67 22.78,62.67 27.86,57.6 49.18,57.6 76.75,30.03 76.75,27.65 76.73,27.63 Q2.1 77.45,27.61 v77.77,27.29 | TP13.TP 96.47,19.18 95.36,19.18 94.25,20.29 94.25,21.19 90.64,24.8 81.98,24.8 | 81.98,24.8 81.72,25.06 R_CL1.1 | 81.98,24.8 79.66,24.8 v79.34,25.12
  Bottom 0.3: v77.77,27.29 79.34,25.72 v79.34,25.12
EPD_BUSY  (via drill 0.3)
  Top 0.15: TP9.TP 106.92,19.18 108.17,17.94 108.17,14.54 107.13,13.5 96.26,13.5 93.83,15.93 86.91,15.93 86.36,15.37 86.36,15.03 J1.9 86.28,14.96 86.28,14.61 86.15,14.47 v86.15,14.2 | v17.66,56.72 10.32,64.06 10.32,64.33 U2.26 | v20.5,53.88 25.62,53.88 v34.76,44.74
  Bottom 0.15: v20.5,53.88 v17.66,56.72 | v34.76,44.74 35.52,44.74 62.12,18.14 79.29,18.14 84.21,13.23 85.18,13.23 v86.15,14.2
EPD_CS  (via drill 0.3)
  Top 0.15: 100.45,16.24 101.66,15.03 TP10.TP | 100.45,16.24 99.93,16.76 86.22,16.76 84.83,15.37 84.83,15.03 J1.12 | v21.33,45.7 20.5,46.54 20.5,46.81 U2.11 | v72.78,26.52 73.41,25.9 R9.1 73.47,25.83 73.68,25.83 75.97,23.55 75.97,23.34 D8.2 76.04,23.55 v76.59,24.1 | 100.45,16.24 102.91,18.7 102.91,19.74 97.02,25.62 82.68,25.62 v82.48,25.83
  Bottom 0.15: v21.33,45.7 34.49,45.7 34.62,45.84 40.44,45.84 40.65,45.64 53.67,45.64 v72.78,26.52 | v82.48,25.83 80.75,25.83 79.01,24.1 v76.59,24.1
EPD_DC  (via drill 0.3)
  Top 0.15: TP11.TP 106.85,14.96 105.67,13.78 101.17,13.78 98.47,16.48 86.42,16.48 85.39,15.44 85.39,15.03 J1.11 85.32,14.96 85.32,14.61 84.42,13.71 v83.1,13.71 | v34,44.87 14.54,44.87 12.88,46.54 12.88,46.81 U2.5
  Bottom 0.15: v34,44.87 61.01,17.87 78.94,17.87 v83.1,13.71
EPD_RST  (via drill 0.3)
  Top 0.15: TP12.TP 96.47,15.03 95.29,16.2 86.63,16.2 85.87,15.44 85.87,15.03 J1.10 85.8,14.96 85.8,14.61 85.04,13.85 v85.04,13.71 | v23.41,56.72 16.69,63.43 16.69,64.33 U2.21 | v34.76,45.36 v25.76,54.36
  Bottom 0.15: v25.76,54.36 v23.41,56.72 | v34.76,45.36 40.79,45.36 50.9,35.25 50.9,33.31 65.79,18.42 79.43,18.42 84.14,13.71 v85.04,13.71
FLASH_CS  (via drill 0.3)
  Top 0.15: R5.1 33.86,48.48 34.28,48.48 35.46,49.65 D9.2 35.25,49.51 34.42,50.34 33.45,50.34 32.99,50.8 32.98,50.81 | 32.98,50.81 32.76,51.03 32.13,51.66 32.13,52.49 32.48,52.84 33.17,52.84 33.73,53.39 33.73,55.19 33.03,55.88 33.03,56.16 U1.1 | v24.93,50.34 21.74,47.16 21.74,46.88 U2.12 | v32.54,50.81 32.98,50.81
  Bottom 0.15: v24.93,50.34 32.07,50.34 v32.54,50.81
GDR  (via drill 0.3)
  Top 0.15: v88.36,13.02 89.82,14.47 89.82,14.96 J1.2 | v73.13,12.67 72.23,13.57 R4.2 72.16,13.64 72.16,13.78 70.64,15.3 69.94,15.3 69.18,14.54 69.04,14.54 Q3.1
  Bottom 0.15: v88.36,13.02 85.8,13.02 85.45,12.67 v73.13,12.67
GND  (via drill 0.3)
  Top 0.15: C10.2 67.73,108.58 66.76,108.58 65.79,107.61 CHANGE_BUTTON.2 65.72,107.61 62.26,107.61 CHANGE_BUTTON.1 62.19,107.55 61.29,107.55 v61.15,107.41 | C6.2 52.77,108.58 52.77,108.44 53.46,107.76 53.46,107.75 53.46,107.35 53.46,106.92 53.25,106.71 51.59,106.71 50.76,107.55 BOOT_BUTTON.2 50.69,107.61 47.3,107.61 BOOT_BUTTON.1 | 60.94,108.58 60.94,109 60.73,109.21 54.9,109.21 53.76,108.06 | 60.94,108.58 60.94,108.24 60.73,108.03 59.83,108.03 54.78,102.97 52.15,102.97 C_DELAY.2 52.08,102.97 51.38,103.67 50.07,103.67 49.86,103.46 49.86,103.18 47.92,101.24 47.78,101.24 IC1.3 47.71,101.17 24.68,101.17 15.9,92.39 | v61.08,108.58 60.94,108.58 | U2.29_7 14.68,52.84 13.5,52.84 U2.29_4 13.43,52.84 12.26,52.84 U2.29_1 12.26,52.77 7.76,48.27 7.76,46.88 U2.1 | U2.29_8 14.75,54.15 14.75,55.33 U2.29_9 | U2.29_3 12.26,55.33 12.26,54.15 U2.29_2 12.33,54.15 13.43,54.15 U2.29_5 13.5,54.15 14.68,54.15 U2.29_8 | U2.29_6 13.43,55.33 12.33,55.33 U2.29_3 | U2.29_3 12.19,55.4 7.76,59.83 7.76,64.33 U2.28 7.69,64.4 7.69,68.07 6.58,69.18 6.58,76.24 15.51,85.18 J4.G1 15.44,85.32 15.44,86.36 14.68,87.12 14.68,90.16 15.44,90.92 J4.G2 15.44,91 15.44,91.94 15.9,92.39 | U2.29_7 14.75,52.91 14.75,54.08 U2.29_8 | C5.2 27.56,108.58 26.8,108.58 25.76,107.55 RESET_BUTTON.2 25.69,107.61 23.34,107.61 | 23.34,107.61 22.3,107.61 RESET_BUTTON.1 | v1.32,83.52 1.32,82.27 J4.G3 | v3.95,91.76 4.71,92.52 J4.P6 4.85,92.59 4.71,92.59 2.29,95.01 2.29,95.36 J4.G4 2.22,95.43 5.61,98.82 C9.2 6.23,99.44 9.97,99.44 11.01,98.4 11.22,98.4 D6.1 11.29,98.33 11.29,95.98 14.88,92.39 15.9,92.39
  Top 0.15: v23.34,107.55 23.34,107.61 | C1_BAT2.2 135.11,42.03 131.99,42.03 131.85,42.17 C3.- 131.78,42.24 130.74,42.24 129.64,43.35 127.97,43.35 126.24,41.62 IC4.2 125.83,41.83 125.97,41.83 126.52,41.27 126.52,40.58 124.86,38.92 124.37,38.92 C1_BAT1.2 124.3,38.85 123.61,38.16 122.64,38.16 121.26,39.54 121.26,41.27 R1_PWRUSB.1 121.19,41.34 121.05,41.34 119.73,42.66 119.73,51.03 | 130.68,49.79 127.42,46.54 127.21,46.54 R2_BAT.1 127.14,46.54 126.59,46.54 121.6,51.52 121.6,51.8 C1_BAT.2 | 130.68,49.79 130.68,50.48 130.12,51.04 129.91,51.04 MCP73831.2 129.77,51.11 129.57,51.11 129.01,51.66 129.01,52.42 131.16,54.57 131.16,56.85 129.91,58.1 | 129.91,58.1 129.91,60.18 TP4.TP | 119.73,51.03 119.73,52.84 125,58.1 129.91,58.1 | C2.2 157.47,10.94 156.23,10.94 C1.2 156.21,10.95 156.21,12.49 155.96,12.74 | SENSOR2.1 154.29,16.41 154.29,15.3 155.05,14.54 155.05,13.57 SENSOR2.7 155.12,13.5 155.12,13.23 155.6,12.74 155.96,12.74 | J2.B12 164.33,51.18 164.33,50.97 J2.A1 164.33,50.9 164.33,49.79 164.88,49.24 J2.MP3 164.95,49.24 166.56,49.24 | 166.57,49.24 168.76,49.24 J2.MP1 | 166.58,59.42 164.95,59.42 J2.MP4 164.81,59.35 164.33,58.86 164.33,57.69 J2.A12 164.33,57.62 164.33,57.41 J2.B1 164.26,57.34 148.92,57.34 148.4,56.82 | 166.58,59.42 168.76,59.42 J2.MP2 | R2-USB.2 153.8,48.27 152.56,47.02 R2-USB1.1 152.56,47.09 151.94,47.71 151.94,49.31 152.28,49.65 152.28,50.97 v152.42,51.04 151.52,51.04 D1.2 | v154.98,53.6 156.23,53.6 C4_USB.2 | U4.9 137.88,52.49 137.88,52.35 137.32,51.8 136.98,51.8 U4.4 136.91,51.73 136.91,50.55 135.25,48.89 134.28,48.89 133.38,49.79 130.68,49.79
  Top 0.15: U4.9 137.88,52.56 137.88,52.7 137.32,53.25 136.98,53.25 U4.1 136.91,53.25 136.28,53.25 135.8,52.77 132.68,52.77 C2_BAT.2 | U4.9 137.88,52.28 138.92,52.28 U4.6 138.99,52.22 147.86,52.22 | 147.86,52.22 148.75,52.22 | 148.75,52.22 149.58,52.22 C5_USB.2 | 148.4,56.82 148.4,52.72 148.37,52.72 147.86,52.22 | 148.4,56.82 148.4,59.49 147.16,60.73 147.16,63.23 TP5.TP | v148.75,52.15 148.75,52.22 | 34.97,52.42 33.03,52.42 U1.4 32.96,52.35 32.62,52.01 v32.62,51.8 | 34.97,52.42 36.84,54.29 U1.9 | 34.97,52.42 34.97,52.35 36.15,51.18 36.15,49.17 35.52,48.54 35.52,48.27 D9.1 35.52,48.2 35.52,47.51 45.91,37.12 45.91,36.91 D12.1 45.98,36.84 48.82,36.84 D11.1 48.82,36.77 50.48,36.77 D10.1 50.55,36.7 v61.01,36.7 | J1.8 86.84,15.03 86.84,15.37 87.12,15.65 90.51,15.65 91.27,14.89 91.27,12.53 J1.MP1 91.2,12.53 87.88,12.53 87.19,11.84 78.46,11.84 77.84,12.46 J1.MP2 77.77,12.53 74.58,12.53 73.54,13.57 R4.1 73.47,13.64 73.13,13.99 73.13,17.04 EPD_C1.1 73.06,17.11 71.95,17.11 EPD_C2.1 | SJ1.1 66.97,10.32 66.97,12.05 R2.1 66.97,12.12 66.97,13.57 69.25,15.86 70.7,15.86 71.88,17.04 EPD_C2.1 | 87.77,21.5 88.36,22.09 88.57,22.09 EPD_C6.1 88.64,22.16 90.3,22.16 EPD_C5.1 | 87.77,21.5 82.34,16.07 82.34,15.03 J1.17 | 92.24,50.41 92.31,50.41 93.56,49.17 C10_SUPERCAP.2 | 92.24,50.41 91.41,50.41 C8.2 | v85.66,50.83 85.04,50.21 85.04,49.65 U3.13 | v92.24,50.48 92.24,50.41 | 82.06,22.16 83.31,22.16 EPD_C9.1 83.38,22.16 85.04,22.16 EPD_C8.1 85.18,22.16 EPD_C7.1 | 82.06,22.16 81.65,22.16 EPD_C10.1 | EPD_C4.1 78.11,22.16 78.75,22.16 78.99,22.4 | EPD_C3.1 79.24,22.16 78.99,22.4 | v74.31,26.45 75,27.15 C7.2
  Top 0.15: v72.99,24.79 73.47,24.79 74.51,23.75 74.51,23.34 D8.1 74.51,23.2 71.26,19.94 71.26,17.87 71.95,17.17 EPD_C2.1 | v84,26.11 84.48,26.11 86.49,28.12 87.46,28.12 D3.1 | v79.01,22.92 79.01,22.42 78.99,22.4 | 82.06,22.16 82.06,22.78 82.41,23.13 v82.41,23.34 | v87.88,21.47 87.81,21.47 87.77,21.5 | v98.54,50.48 119.19,50.48 119.73,51.03 | v15.93,52.91 14.82,52.91 U2.29_7 | 155.96,12.74 156.46,12.74 156.64,12.93 156.64,13.5 SENSOR2.5 156.71,13.57 160.94,17.8 165.16,17.8 J3.1 165.3,17.8 165.51,17.8 166.23,18.52 166.23,48.91 166.56,49.24 | 166.56,49.24 166.57,49.24 | 166.57,49.24 166.89,49.56 166.89,59.1 166.58,59.42
  Top 0.152: 53.76,108.06 53.76,107.65 53.46,107.35
  Bottom 0.15: v61.15,107.41 61.15,108.52 v61.08,108.58 | v1.32,83.52 1.32,89.12 v3.95,91.76 4.02,91.76 19.8,107.55 v23.34,107.55 | v154.98,53.6 v152.42,51.04 149.86,51.04 v148.75,52.15 | v72.99,24.79 74.31,26.11 v74.31,26.45 74.31,26.52 85.66,37.88 v85.66,50.83 86.01,50.48 v92.24,50.48 v98.54,50.48 | 81.82,23.93 80.88,22.99 79.01,22.99 | 81.82,23.93 v84,26.11 | 79.01,22.99 75.69,22.99 75,23.68 73.34,23.68 72.99,24.03 v72.99,24.79 | v79.01,22.92 79.01,22.99 | 81.82,23.93 v82.41,23.34 82.41,23.27 86.28,23.27 87.88,21.68 v87.88,21.47 | v61.01,36.7 72.92,24.79 v72.99,24.79 | v15.93,52.91 31.51,52.91 v32.62,51.8
  pour Top: 6.46,46.56 6.44,46.54 6.42,46.52 0.08,46.52 0.08,0.08 75.32,0.08 75.32,10.02 75.34,10.04 75.36,10.06 75.38,10.08 93.62,10.08 93.64,10.06 93.66,10.04 93.68,10.02 93.68,0.08 170.12,0.08 170.12,67.12 92.18,67.12 92.16,67.14 92.14,67.16 92.12,67.18 92.12,111.12 68.08,111.12 68.08,109.88 68.06,109.86 68.04,109.84 68.02,109.82 19.98,109.82 19.96,109.84 19.94,109.86 19.92,109.88 19.92,111.12 0.08,111.12 0.08,64.68 6.42,64.68 6.44,64.66 6.46,64.64 6.48,64.62 6.48,46.58
  pour Bottom: 6.46,46.56 6.44,46.54 6.42,46.52 0.08,46.52 0.08,0.08 75.32,0.08 75.32,10.02 75.34,10.04 75.36,10.06 75.38,10.08 93.62,10.08 93.64,10.06 93.66,10.04 93.68,10.02 93.68,0.08 170.12,0.08 170.12,67.12 92.18,67.12 92.16,67.14 92.14,67.16 92.12,67.18 92.12,111.12 68.08,111.12 68.08,109.88 68.06,109.86 68.04,109.84 68.02,109.82 19.98,109.82 19.96,109.84 19.94,109.86 19.92,109.88 19.92,111.12 0.08,111.12 0.08,64.68 6.42,64.68 6.44,64.66 6.46,64.64 6.48,64.62 6.48,46.58
GPIO8  (via drill 0.3)
  Top 0.15: v20.01,42.87 19.94,42.94 19.25,42.94 R1.1 | v19.6,45.7 19.6,46.4 19.18,46.81 U2.10
  Bottom 0.15: v20.01,42.87 19.6,43.28 v19.6,45.7
I2C_PW  (via drill 0.3)
  Top 0.15: C2.1 156.23,9.63 C1.1 156.16,9.7 154.91,10.94 | 154.91,10.94 153.67,9.7 R1_PINH.2 | 154.91,10.94 R2_PINH.2 154.91,11.01 154.29,11.63 154.29,13.5 SENSOR2.8 154.22,13.57 154.22,14.96 153.8,15.37 153.8,17.94 | SENSOR2.6 155.81,13.57 155.81,15.44 155.12,16.14 155.12,16.41 SENSOR2.2 155.05,16.48 155.05,16.69 153.8,17.94 | v75.76,57.96 28.67,57.96 23.55,63.09 22.71,63.09 21.74,64.06 21.74,64.33 U2.17 | v138.92,32.83 153.79,17.95 153.8,17.94
  Bottom 0.15: v75.76,57.96 82.13,51.59 120.15,51.59 v138.92,32.83
INT_RTC  (via drill 0.3)
  Top 0.15: 78.25,53.81 80.33,51.73 80.68,51.73 81.72,50.69 81.72,48.75 83.17,47.3 86.28,47.3 R1_PINH1.1 | 78.25,57.27 78.25,59.76 84.69,66.2 TP15.TP | 78.25,57.27 78.25,53.81 | v17.45,47.99 16.69,47.23 16.69,46.88 U2.8 | v71.53,47.16 78.18,53.81 78.25,53.81 | v84.9,57.27 86.22,58.59 86.22,58.93 U3.3 | v78.11,57.27 78.25,57.27
  Bottom 0.15: v17.45,47.99 24.1,47.99 24.93,47.16 v71.53,47.16 | v78.11,57.27 v84.9,57.27
IO/BOOT  (via drill 0.3)
  Top 0.15: C6.1 52.7,107.34 52.56,107.34 50.76,109.14 BOOT_BUTTON.3 50.69,109.07 47.3,109.07 BOOT_BUTTON.4 47.23,109.14 45.5,107.41 R_BOOT.1 45.43,107.34 44.94,106.85 v44.94,105.67 | v24.31,74.17 24.31,64.4 U2.15
  Bottom 0.15: v24.31,74.17 24.31,85.04 v44.94,105.67
IO/CHANGE
  Top 0.15: C10.1 67.8,107.41 67.8,107.61 68.42,108.24 68.42,109.07 68.28,109.21 65.86,109.21 65.79,109.14 CHANGE_BUTTON.3 65.72,109.07 62.26,109.07 CHANGE_BUTTON.4 62.19,109.07 60.45,107.34 60.25,107.34 R_CHANGE.1 60.18,107.27 53.6,100.69 50.21,100.69 14.13,64.61 14.13,64.4 U2.23
MISO  (via drill 0.3)
  Top 0.15: v46.74,34.14 46.67,34.14 46.05,33.52 R8.1 | v46.74,37.6 45.98,38.36 D12.2 45.91,38.43 39.27,45.08 39.27,56.09 38.64,56.72 32.55,56.72 32.27,56.44 32.27,55.95 32.81,55.41 | 32.81,55.41 32.96,55.26 32.96,54.98 U1.2 | v31.23,56.23 16.9,56.23 9.07,64.06 9.07,64.33 U2.27 9,64.4 9,64.68 v8.17,65.51 | v8.17,90.72 5.26,93.63 5.12,93.63 J4.P7 | v31.72,58.45 44.46,58.45 76.17,90.16 76.17,98.96 TP6.TP | v32.26,55.41 32.81,55.41
  Bottom 0.15: v46.74,37.6 v46.74,34.14 | v32.26,55.41 31.44,56.23 v31.23,56.23 30.47,56.23 30.12,56.58 30.12,56.85 v31.72,58.45 | v8.17,65.51 v8.17,90.72
MOSI  (via drill 0.3)
  Top 0.15: J1.14 83.79,14.96 83.79,14.61 83.52,14.34 78.6,14.34 75.28,17.66 75.28,23.82 73.82,25.28 57.06,25.28 48.89,33.45 R7.1 48.82,33.52 v48.13,34.21 | 41.14,45.83 48.75,38.23 D11.2 48.75,38.16 v48.06,37.46 | 41.14,45.83 40.79,46.19 v40.71,46.19 | v16.27,45.7 15.37,46.6 15.37,46.81 U2.7 15.37,46.88 15.37,47.09 16.41,48.13 16.41,54.78 11.01,60.18 v11.01,60.94 | v6.79,88.29 5.89,89.19 5.12,89.19 J4.P3 | v45.77,58.45 45.77,58.47 81.54,94.23 TP7.TP | v40.37,53.05 40.37,52.77 40.72,52.42 U1.5 40.79,52.35 40.79,46.65 41.14,46.29 41.14,45.83
  Bottom 0.15: v16.27,45.7 18.97,45.7 19.46,46.19 v40.71,46.19 | v6.79,88.29 6.79,65.16 v11.01,60.94 | v40.37,53.05 v45.77,58.45 | v48.13,34.21 48.13,37.4 v48.06,37.46
N$1
  Top 0.15: R2-USB.1 152.56,48.27 152.56,50.55 153.11,51.11 153.11,52.35 156.09,55.33 163.08,55.33 163.78,56.02 164.26,56.02 J2.B5
N$2  (via drill 0.3)
  Top 0.15: v154.77,47.02 153.87,47.02 R2-USB1.2 | v157.75,47.02 163.71,52.98 164.26,52.98 J2.A5
  Bottom 0.15: v157.75,47.02 v154.77,47.02
N$3
  Top 0.15: C1_BAT1.1 122.99,38.92 122.99,40.72 D2.1 123.06,40.72 123.2,40.86 125.14,40.86 | 125.14,40.86 125.76,40.86 IC4.3 | 125.14,40.86 125.14,42.24 125.27,42.38 125.34,42.38 125.76,42.8 IC4.1 125.83,42.87 126.59,43.63 131.37,43.63 135.18,47.44 135.66,47.44 Q1.2
N$4
  Top 0.15: C4.1 92.73,31.86 91.06,31.86 D4.1 91,31.86 91,28.18 D3.2
N$5
  Top 0.15: R1_BAT.2 125.34,50.28 126.17,50.28 126.52,50.62 129.15,50.62 129.57,50.21 129.84,50.21 MCP73831.1
N$6
  Top 0.15: J1.4 88.78,14.96 88.78,14.47 87.53,13.23 78.74,13.23 73.61,18.35 73.13,18.35 EPD_C1.2
N$7
  Top 0.15: R2_BAT.2 127.21,47.78 127.21,50.14 MCP73831.5
N$8
  Top 0.15: CHG_LED.C 124.03,51.8 124.03,50.28 R1_BAT.1
N$10  (via drill 0.3)
  Top 0.15: v87.39,13.71 88.29,14.61 88.29,14.96 J1.5 | v73.96,17.38 73.54,17.8 72.5,17.8 71.95,18.35 EPD_C2.2
  Bottom 0.15: v87.39,13.71 86.08,13.71 85.32,12.95 78.39,12.95 v73.96,17.38
N$11  (via drill 0.3)
  Top 0.15: v83.03,21.4 80.88,19.25 80.88,15.03 J1.20 | v84.42,22.78 85.04,23.41 EPD_C8.2
  Bottom 0.15: v84.42,22.78 v83.03,21.4
N$13
  Top 0.15: J1.22 79.84,15.03 79.84,21.05 80.88,22.09 80.88,22.71 81.58,23.41 EPD_C10.2
N$14
  Top 0.15: C_DELAY.1 51.33,101.62 50.57,102.38 IC1.5
N$15
  Top 0.15: J1.24 78.81,15.03 78.81,20.29 77.42,21.68 77.42,22.78 78.05,23.41 EPD_C4.2
N$16
  Top 0.15: D7.1 86.49,62.74 86.49,61.63 86.84,61.29 R_CAPACITOR.1
N$17
  Top 0.15: J1.18 81.85,15.03 81.85,16.07 87.95,22.16 87.95,22.78 88.57,23.41 EPD_C6.2
N$18  (via drill 0.3)
  Top 0.15: v84.76,21.4 81.37,18 81.37,15.03 J1.19 | v86.15,22.78 86.84,23.48 EPD_C7.2
  Bottom 0.15: v86.15,22.78 v84.76,21.4
PREVGH  (via drill 0.3)
  Top 0.15: v80.33,20.43 80.33,15.03 J1.21 | v82.55,22.64 83.31,23.41 EPD_C9.2 83.38,23.48 83.65,23.75 v84.21,23.75 | v84.21,34.85 82.39,34.85 81.92,35.32 80,35.32 D5.1
  Bottom 0.15: v82.55,22.64 v80.33,20.43 | v84.21,34.85 84.48,34.57 84.48,24.03 v84.21,23.75
PREVGL  (via drill 0.3)
  Top 0.15: v79.36,19.53 79.36,15.03 J1.23 | D4.2 87.53,31.86 v88.36,31.02 88.36,30.4 84.69,26.73 v84,26.73 | v80.75,23.48 79.92,23.48 EPD_C3.2
  Bottom 0.15: v79.36,19.53 86.56,19.53 88.36,21.33 v88.36,31.02 | v84,26.73 v80.75,23.48
RESE  (via drill 0.3)
  Top 0.15: v87.05,12.33 89.26,14.54 89.26,14.96 J1.3 | v72.57,11.49 70.29,11.49 R3.2 70.29,11.56 70.29,14.47 Q3.2
  Bottom 0.15: v87.05,12.33 73.41,12.33 v72.57,11.49
RESE'
  Top 0.15: R2.2 68.28,12.05 68.28,10.46 68.42,10.32 SJ1.2 68.49,10.25 70.22,10.25 R3.1
RESET  (via drill 0.3)
  Top 0.15: RESET_BUTTON.4 22.3,109.07 25.69,109.07 RESET_BUTTON.3 25.76,109.14 26.94,109.14 27.01,109.21 28.18,109.21 28.25,109.14 28.25,108.04 28.89,107.41 | R_RESET.1 20.71,107.34 20.98,107.34 21.47,106.85 27.08,106.85 27.56,107.34 C5.1 27.63,107.41 28.25,107.41 28.89,107.41 | v47.44,103.81 47.71,103.53 47.71,103.18 IC1.1 | v43.84,107.41 28.89,107.41 | v12.19,52.08 10.32,50.21 10.32,46.88 U2.3
  Bottom 0.15: v43.84,107.41 v47.44,103.81 47.44,96.67 12.19,61.42 v12.19,52.08
RTC_RST  (via drill 0.3)
  Top 0.15: v45.64,60.25 26.8,60.25 22.99,64.06 22.99,64.33 U2.16 | v84.35,57.76 84.35,58.31 84.97,58.93 U3.4
  Bottom 0.15: v45.64,60.25 81.85,60.25 v84.35,57.76
RX
  Top 0.15: U2.24 12.88,64.4 12.88,69.6 12.95,69.67 TP2.TP
SCK  (via drill 0.3)
  Top 0.15: v84.28,14.2 84.28,14.96 J1.13 | v51.38,33.45 50.62,33.45 R6.1 | v15.93,48.96 14.13,47.16 14.13,46.88 U2.6 | v39.75,53.05 40.23,53.53 40.72,53.53 U1.6 40.79,53.6 40.79,53.39 50.48,43.7 50.48,38.23 D10.2 50.55,38.16 v51.38,37.33 | v6.3,90.37 5.26,91.41 5.12,91.41 J4.P5 | v47.78,58.45 48.19,58.45 86.82,97.08 TP8.TP
  Bottom 0.15: v84.28,14.2 84.07,14.2 74.86,23.41 61.42,23.41 v51.38,33.45 v51.38,37.33 | v6.3,90.37 6.3,65.23 10.53,61.01 10.53,51.11 12.67,48.96 v15.93,48.96 35.66,48.96 v39.75,53.05 39.75,52.98 40.16,52.56 40.51,52.56 46.4,58.45 v47.78,58.45
SCL  (via drill 0.3)
  Top 0.15: v154.98,8.93 154.98,9.63 R2_PINH.1 | v156.3,15.51 156.3,15.79 156.64,16.14 156.64,16.41 SENSOR2.4 | v140.16,52.77 138.99,52.77 U4.7 | 163.54,22.47 165.16,20.84 J3.4 | 163.54,22.47 v140.16,45.84 | v30.61,56.72 25.28,56.72 17.94,64.06 17.94,64.33 U2.20 | v85.66,53.12 88.78,50 88.78,49.65 U3.16 | v163.09,22.27 163.29,22.47 163.54,22.47
  Bottom 0.15: v154.98,8.93 154.98,14.2 v156.3,15.51 156.34,15.51 v163.09,22.27 | v140.16,45.84 v140.16,52.77 140.16,53.39 139.82,53.74 86.36,53.74 85.73,53.12 v85.66,53.12 81.65,53.12 75.55,59.21 33.1,59.21 v30.61,56.72
SDA  (via drill 0.3)
  Top 0.15: v139.68,53.25 138.99,53.25 U4.8 | R1_PINH.1 153.6,11.01 153.6,15.17 138.43,30.33 138.43,32.96 138.78,33.31 139.12,33.31 139.61,32.83 v139.68,32.83 155.81,16.69 155.81,16.48 SENSOR2.3 155.88,16.69 v156.5,17.31 | v158.93,19.74 165.16,19.74 J3.3 | v31.58,57.06 31.44,57.2 26.04,57.2 19.18,64.06 19.18,64.33 U2.19 | v81.72,52.63 85.45,52.63 87.46,50.62 87.46,49.65 U3.15
  Bottom 0.15: v139.68,32.83 139.68,52.07 | 139.68,52.07 139.68,52.63 v139.68,53.25 | v156.5,17.31 v158.93,19.74 | v31.58,57.06 43.77,57.06 45.64,58.93 75.41,58.93 v81.72,52.63 139.01,52.63 139.11,52.63 139.12,52.63 139.68,52.07
SRC  (via drill 0.3)
  Top 0.15: v86.08,33.17 92.73,33.17 C4.2 | v84.44,35.75 83.21,35.75 D5.2 | v73.47,24.17 69.67,20.36 69.67,16.69 Q3.3 | v82.3,33.77 L1.1
  Bottom 0.15: v86.08,33.17 86.08,33.64 84.44,35.28 v84.44,35.75 83.08,34.39 83.08,33.96 | v73.47,24.17 73.47,24.65 79.95,31.12 81.91,31.12 83.08,32.29 83.08,33.96 | 83.08,33.96 82.89,33.77 v82.3,33.77
SS_SD  (via drill 0.3)
  Top 0.15: 8.19,98.82 8.66,98.82 9.28,98.82 9.7,98.4 D6.2 | 8.19,98.82 7.41,98.82 R10.1 | v11.49,50.76 11.49,46.88 U2.4 | 6.89,86.74 5.54,88.09 J4.P2 | 6.89,86.74 v11.49,82.13 | 6.89,86.74 6.89,87.7 8.66,89.47 8.66,98.25 8.66,98.35 8.19,98.82
  Bottom 0.15: v11.49,82.13 v11.49,50.76
TX
  Top 0.15: U2.25 11.49,64.4 11.49,66 7.83,69.67 TP1.TP
USB_D+  (via drill 0.3)
  Top 0.15: v151.1,52.63 151.45,52.28 151.45,51.94 D1.1 | v25.07,47.64 24.31,46.88 U2.14
  Bottom 0.15: v151.1,52.63 148.61,52.63 148.26,52.28 148.26,52.01 150,50.28 150.62,50.28 150.97,49.93 150.97,43.49 139.82,32.34 117.31,32.34 98.33,51.31 38.43,51.31 34.76,47.64 v25.07,47.64
USB_D-  (via drill 0.3)
  Top 0.15: v150.48,49.79 150.69,50 151.45,50 D1.3 | v25.41,53.39 25.41,49.51 22.99,47.09 22.99,46.88 U2.13
  Bottom 0.15: v150.48,49.79 144.18,49.79 132.96,61.01 33.03,61.01 v25.41,53.39
VBAT
  Top 0.3: 134.76,51.18 134.76,51.19 134.26,50.69 132.55,50.69 131.23,52.01 131.09,52.08 | 134.76,51.18 134.76,49.58 Q1.3 | 134.76,51.18 135.85,52.27 | 135.85,52.27 136.35,52.77 U4.2 | 131.09,52.08 131.09,53.46 131.64,54.02 132.61,54.02 C2_BAT.1 132.75,54.02 133.79,54.02 138.78,59 147.09,59 TP3.TP | 131.09,52.08 131.02,52.01 129.91,52.01 MCP73831.3 | 135.85,52.27 U4.3
VBUS
  Top 0.3: 154.98,50.97 154.01,50.97 D1.5 | C5_USB.1 149.58,50.9 147.88,50.9 | TP14.TP 130.68,56.51 130.74,56.44 130.74,55.05 128.46,52.77 128.46,52.25 128.22,52.01 127.35,52.01 MCP73831.4 127.21,52.01 126.73,52.01 126.59,51.87 125.62,51.87 CHG_LED.A 125.48,51.87 124.93,51.87 124.93,52.63 124.65,52.91 120.47,52.91 120.29,52.73 120.29,51.94 C1_BAT.1 120.29,51.8 120.29,42.66 120.36,42.59 121.12,42.59 R1_PWRUSB.2 122.23,42.59 122.43,42.8 122.92,42.8 D2.2 123.06,42.8 124.17,42.8 124.93,43.56 125.9,43.56 128.87,46.54 133.47,46.54 133.79,46.85 133.79,47.44 Q1.1 133.81,48.16 134.1,48.45 135.7,48.45 135.94,48.68 137.18,48.68 140.3,51.8 146.97,51.8 147.88,50.9 | 147.88,50.9 148.44,50.33 148.44,49.14 148.26,48.96 148.26,42.24 148.33,42.17 152.9,42.17 154.01,43.28 154.01,44.39 PFMF.050.1.2 154.01,44.53 154.01,45.5 155.43,46.91 155.43,50.52 154.98,50.97 | 154.98,50.97 154.98,50.98 155.42,51.42 155.42,52.08 155.64,52.3 C4_USB.1
VRTC
  Top 0.3: 90.51,49.24 90.58,49.17 91.34,49.17 C8.1 | 90.51,49.24 90.51,50.94 90.89,51.31 93.56,51.31 C10_SUPERCAP.1 | 90.51,49.24 90.37,49.17 90.16,49.17 89.19,48.2 86.56,48.2 86.28,48.48 86.28,49.51 U3.14 86.25,51.3 85.45,52.11 80.5,52.11 78.62,53.99 78.62,59.59 79.35,60.32 87.91,60.32 88.19,60.6 R_CAPACITOR.2
VUSB
  Top 0.3: J2.A4 164.33,51.8 164.33,52.01 J2.B9 164.47,52.08 165.02,52.08 165.23,52.28 165.23,53.39 165.51,53.67 165.51,54.43 165.23,54.71 165.23,56.3 165.02,56.51 164.47,56.51 J2.B4 | J2.B4 164.33,56.58 164.33,56.78 J2.A9 | J2.B4 164.19,56.51 163.84,56.51 163.64,56.72 160.73,56.72 159.76,55.75 155.95,55.75 154.5,54.29 152.84,54.29 151.73,53.18 150.9,53.18 150.48,52.77 150.48,52.56 150.34,52.42 150.34,51.73 150.27,51.66 150.27,51.45 150.34,51.38 150.34,50.41 148.75,48.82 148.75,46.33 149.51,45.57 149.51,44.46 PFMF.050.1.1